# Altium PCB Sitara_Project_Rev_A_PCB.PcbDoc (part 9 of 9)
Units mm, origin at the board's own origin, x right, y up, seen from the top; angles counter-clockwise.
Board outline 120 x 85 mm, 8 copper layers (L1 (Sig), L2 (GND), L3 (PWR), L4 (Sig), L5 (GND), L6 (Sig), L7 (GND), L8 (Sig)), stack 1.188 mm thick; 458 components, 357 nets, 1916 pads, 1164 vias.
Unrouted connection lines stored in the file: 516.
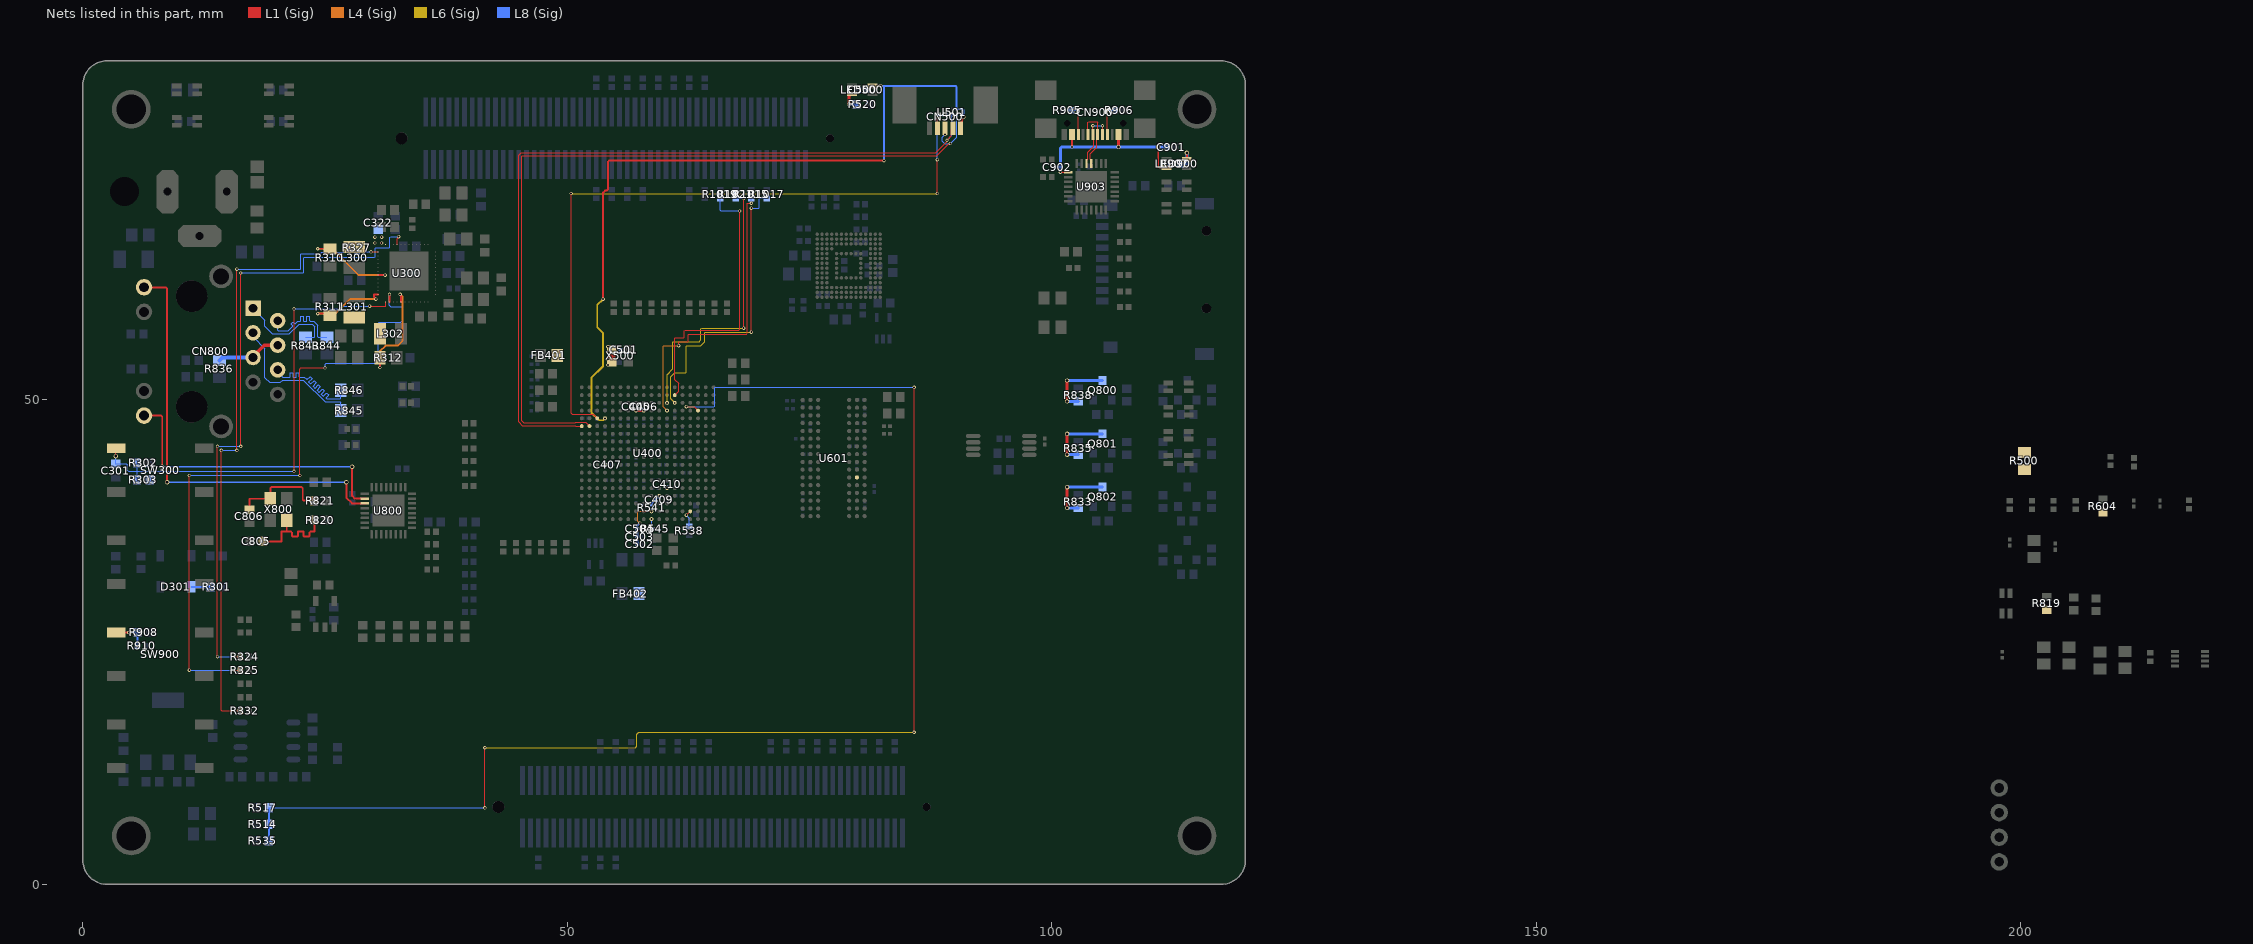
[diagram p12: the nets of this part, all layers, seen from the top]

## Via types
v1: diameter 0.35, hole 0.2, L1 (Sig) to L8 (Sig), tented both sides, 846 vias
v2: diameter 0.45, hole 0.3, L1 (Sig) to L8 (Sig), tented both sides, 302 vias
v3: diameter 0.45/0.45/0.45/0.45/0.45/0.45/0.45/0.45 (per signal layer), hole 0.3, L1 (Sig) to L8 (Sig), tented both sides, 16 vias

## Nets (pads, with @x,y where several pads share a name; then routed paths per layer and width w, separated by ;. In a path a pad name is that pad's centre, name@x,y a point inside that pad or via, vN(x,y) a via of type N, cw(c..) or ccw(c..) an arc to the next point about the centre after c; other vN are vias at no path point) (continued)
PMIC_nWAKEUP: R327.1 R332.1 U300.13 | length 65.3
  L1 (Sig) w0.1: v1(14.3,44.8) 14.3,17.959 14.359,17.9 R332.1@16.26,17.9 ; v1(15.9,44.8) v1(15.9,63.5) ; v1(29.75,65.275) U300.13@30.475,65.275
  L8 (Sig) w0.1: v1(14.3,44.8) v1(15.9,44.8) ; v1(15.9,63.5) 22.441,63.5 22.5,63.559 22.5,65.041 22.559,65.1 24.5,65.1 24.66,65.26 R327.1@28.3,65.26 28.315,65.275 v1(29.75,65.275)
PMIC_PB_IN: C301.2 R302.1 R303.1 SW300.1 U300.25 | length 49.2
  L1 (Sig) w0.1: v2(3.4,44.2) SW300.1@3.4,44.95 ; v1(21.8,42.625) v1(21.8,59.4) ; v1(29.6,59.675) 31.25,59.675 U300.25@31.25,60.1
  L1 (Sig) w0.2: SW300.1@3.4,44.95 SW300.1@3.45,45
  L8 (Sig) w0.1: v2(3.4,44.2) C301.2@3.4,43.375 3.425,43.4 4.483,43.4 4.6,43.283 4.6,42.742 4.717,42.625 5.6,42.625 ; R303.1@5.6,41.75 5.6,42.625 ; R302.1@5.6,43.5 5.6,42.625 ; v1(21.8,42.625) 5.6,42.625 ; v1(21.8,59.4) 26.5,59.4 26.775,59.675 v1(29.6,59.675)
PMIC_PRIMARY_PGOOD: R325.1 U300.26 | length 67.7
  L1 (Sig) w0.1: v1(11,22.1) v1(11,42.2) ; v1(15.6,22.1) R325.1@16.26,22.1 ; v1(22.4,42.2) 22.4,53.183 22.517,53.3 v1(25,53.3)
  L1 (Sig) w0.2: U300.26@31.65,60.1 v1(31.65,60.9)
  L8 (Sig) w0.1: v1(11,22.1) v1(15.6,22.1) ; v1(11,42.2) v1(22.4,42.2) ; v1(25,53.3) 25,53.683 25.117,53.8 30.383,53.8 30.5,53.917 30.5,57.883 30.617,58 32.8,58 33,58.2 33,59.483 32.883,59.6 31.8,59.6 31.65,59.75 v1(31.65,60.9)
PMIC_PWR_EN: R324.1 U300.9 | length 65
  L1 (Sig) w0.1: v1(13.9,23.5) v1(13.9,45.2) ; v1(15.6,23.5) R324.1@16.26,23.5 ; v1(16.3,45.2) v1(16.3,63.1) ; U300.9@32.448,66.05 32.448,66.637 32.592,66.78 v1(32.592,66.848)
  L8 (Sig) w0.1: v1(13.9,23.5) v1(15.6,23.5) ; v1(13.9,45.2) v1(16.3,45.2) ; v1(16.3,63.1) 22.741,63.1 22.8,63.159 22.8,64.641 22.859,64.7 30.1,64.7 30.2,64.8 30.2,65.641 30.259,65.7 31.641,65.7 31.7,65.759 31.7,66.789 31.759,66.848 v1(32.592,66.848)
PMIC_VDCDC1: L300.2 R310.1 U300.19 | length 10.1
  L1 (Sig) w0.2: v1(24.25,65.6) 25.465,65.6 R310.1@25.5,65.565 ; U300.19@30.475,62.875 v1(31.2,62.875)
  L4 (Sig) w0.2: v1(24.25,65.6) 25.75,65.6 28.475,62.875 v1(31.2,62.875)
PMIC_VDCDC2: L301.2 R311.1 U300.24 | length 8.9
  L1 (Sig) w0.2: v1(24.25,58.9) 25.325,58.9 R311.1@25.5,58.725 ; v1(30.25,60.4) 30.25,60.441 30.05,60.641 30.05,60.875 U300.24@30.475,60.875
  L4 (Sig) w0.2: v1(24.25,58.9) 26.05,58.9 27.55,60.4 v1(30.25,60.4)
PMIC_VDCDC3: L302.2 R312.1 U300.29 | length 11.2
  L1 (Sig) w0.2: v1(30.66,53.35) R312.1@30.66,54.35 ; v1(32.75,60.9) 32.75,60.859 32.85,60.759 U300.29@32.85,60.1
  L4 (Sig) w0.2: v1(30.66,53.35) 30.66,55.01 31.25,55.6 32.5,55.6 33,56.1 33,60.65 v1(32.75,60.9)
RJ45_LED_GR_A: CN800.9 U800.3 | length 44.7
  L1 (Sig) w0.2: CN800.9@6.32,61.63 6.35,61.6 8.583,61.6 8.7,61.483 v2(8.7,41.5) ; v2(27.2,41.5) 27.2,39.9 27.785,39.315 U800.3@29.115,39.315
  L8 (Sig) w0.2: v2(8.7,41.5) v2(27.2,41.5)
RJ45_LED_YEL_A: CN800.12 R819.1 U800.2 | length 31.1
  L1 (Sig) w0.2: CN800.12@6.32,48.38 8.083,48.38 8.2,48.263 v2(8.2,43.1) ; v2(27.8,43.1) 27.8,40.1 28.085,39.815 U800.2@29.115,39.815
  L8 (Sig) w0.2: v2(8.2,43.1) v2(27.8,43.1)
RJ45_RX_N: CN800.6 R846.2 | length 15
  L8 (Sig) w0.1: CN800.6@20.11,53.105 20.11,52.866 20.621,52.355 21.1,52.355 21.375,52.355 21.433,52.414 21.433,52.787 21.448,52.802 21.718,52.802 21.733,52.787 21.733,52.359 21.748,52.344 22.018,52.344 22.033,52.359 22.033,52.787 22.048,52.802 22.318,52.802 22.333,52.787 22.333,52.414 22.392,52.355 22.742,52.355 22.869,52.355 23.062,52.162 23.097,52.127 23.18,52.127 23.451,52.398 23.473,52.398 23.664,52.207 23.664,52.186 23.335,51.858 23.335,51.836 23.526,51.646 23.548,51.646 23.876,51.974 23.897,51.974 24.088,51.783 24.088,51.761 23.76,51.433 23.76,51.412 23.951,51.221 23.972,51.221 24.3,51.549 24.321,51.549 24.512,51.358 24.512,51.337 24.184,51.009 24.184,50.988 24.375,50.797 24.396,50.797 24.724,51.125 24.745,51.125 24.936,50.934 24.936,50.913 24.608,50.585 24.608,50.564 24.799,50.373 24.82,50.373 25.148,50.701 25.17,50.701 25.361,50.51 25.361,50.489 25.113,50.241 25.113,50.159 25.172,50.1 25.381,50.1 26.566,50.1 26.625,50.159 R846.2@26.625,51
RJ45_RX_P: CN800.3 R845.2 | length 15.1
  L8 (Sig) w0.1: CN800.3@17.57,56.915 17.57,56.53 18.8,55.3 18.8,52.3 19.3,51.8 20.4,51.8 20.655,52.055 22.745,52.055 25,49.8 26.566,49.8 26.625,49.741 R845.2@26.625,48.9
RJ45_TCT: CN800.4 CN800.5 R836.1 | length 6.7
  L1 (Sig) w0.4: CN800.5@17.57,54.375 17.57,54.487 18.728,55.645 CN800.4@20.11,55.645
  L8 (Sig) w0.4: R836.1@14.1,54.075 14.4,54.375 CN800.5@17.57,54.375
RJ45_TX_N: CN800.2 R844.2 | length 10.4
  L8 (Sig) w0.1: CN800.2@20.11,58.185 20.11,57.18 20.169,57.122 21.197,57.122 21.656,57.58 21.656,57.663 21.493,57.826 21.493,57.847 21.684,58.038 21.705,58.038 21.868,57.875 21.951,57.875 22.198,58.123 22.2,58.125 22.457,58.125 22.516,58.183 22.516,58.64 22.531,58.655 22.801,58.655 22.816,58.64 22.816,58.136 22.831,58.121 23.101,58.121 23.116,58.136 23.116,58.64 23.131,58.655 23.401,58.655 23.416,58.64 23.416,58.183 23.474,58.125 23.824,58.125 24.252,57.697 24.252,56.534 24.311,56.475 R844.2@25.2,56.475
RJ45_TX_P: CN800.1 R843.2 | length 10.4
  L8 (Sig) w0.1: CN800.1@17.57,59.455 18.8,58.225 18.8,57.6 19.578,56.822 21.322,56.822 22.324,57.825 23.7,57.825 23.952,57.572 23.952,56.534 23.894,56.475 R843.2@23,56.475
RTC_KALDO_nEN: R538.1 U400.B4 | length 1.8
  L1 (Sig) w0.1: v1(62.3,38.1) U400.B4@62.7,38.5
  L8 (Sig) w0.1: v1(62.3,38.1) 62.6,37.8 R538.1@62.6,36.94
STATUS_LED_B: Q802.3 R833.2 | length 6.9
  L1 (Sig) w0.3: v2(101.6,38.85) v2(101.6,41)
  L8 (Sig) w0.3: v2(101.6,38.85) R833.2@102.75,38.85 ; v2(101.6,41) Q802.3@105.25,41
STATUS_LED_G: Q801.3 R835.2 | length 7
  L1 (Sig) w0.3: v2(101.6,44.35) v2(101.6,46.5)
  L8 (Sig) w0.3: v2(101.6,44.35) R835.2@102.75,44.35 ; v2(101.6,46.5) Q801.3@105.25,46.5
STATUS_LED_R: Q800.3 R838.2 | length 6.9
  L1 (Sig) w0.3: v2(101.6,49.85) v2(101.6,52)
  L8 (Sig) w0.3: v2(101.6,49.85) R838.2@102.75,49.85 ; v2(101.6,52) Q800.3@105.25,52
SYS_BOOT2: R514.1 R517.2 R535.2 U400.R3 | length 140
  L1 (Sig) w0.1: v1(41.5,7.9) v1(41.5,14.1) ; v1(62.3,49.3) 63.1,49.3 U400.R3@63.5,48.9 ; v1(85.8,15.7) v1(85.8,51.3)
  L6 (Sig) w0.1: v1(41.5,14.1) 57.041,14.1 57.2,14.259 57.2,15.5 57.4,15.7 v1(85.8,15.7)
  L8 (Sig) w0.1: R517.2@19.2,7.9 v1(41.5,7.9) ; v1(62.3,49.3) 65.141,49.3 65.2,49.359 65.2,51.241 65.259,51.3 v1(85.8,51.3)
  L8 (Sig) w0.2: R535.2@19.2,4.5 R514.1@19.2,6.2 R517.2@19.2,7.9
SYS_nRESET: R908.1 R910.1 SW900.1 | length 3.6
  L1 (Sig) w0.2: SW900.1@3.45,26 v2(4.8,26)
  L8 (Sig) w0.2: v2(4.8,26) R908.1@5.65,26 5.65,24.61 R910.1@5.66,24.6
TIMER4: R1015.2 U400.R7 | length 31
  L1 (Sig) w0.1: v1(61.5,55.6) 61.5,55.941 61.559,56 62.441,56 62.5,56.059 62.5,56.741 62.559,56.8 68.541,56.8 68.6,56.859 68.6,70.3 v1(69,70.3)
  L4 (Sig) w0.1: v1(60.3,48.9) 59.9,49.3 59.9,55.541 59.959,55.6 v1(61.5,55.6)
  L8 (Sig) w0.1: v1(69,70.3) R1015.2@69,70.8
TIMER5: R1017.2 U400.T6 | length 30.5
  L1 (Sig) w0.1: v1(69,57) v1(69,69.8)
  L6 (Sig) w0.1: v1(61.1,49.7) 60.7,50.1 60.7,52.4 61.1,52.8 62.241,52.8 62.3,52.859 62.3,55.541 62.359,55.6 63.8,55.6 64.2,56 64.2,56.941 64.259,57 v1(69,57)
  L8 (Sig) w0.1: v1(69,69.8) 69.741,69.8 69.8,69.859 69.8,70.741 69.859,70.8 R1017.2@70.6,70.8
TIMER6: R1019.2 U400.U6 | length 29.1
  L1 (Sig) w0.1: U400.U6@61.1,50.5 61.5,50.9 61.5,51.7 61.1,52.1 61.1,56.341 61.159,56.4 62.041,56.4 62.1,56.459 62.1,57.141 62.159,57.2 67.7,57.2 67.8,57.3 v1(67.8,69.5)
  L8 (Sig) w0.1: R1019.2@65.8,70.8 65.8,69.559 65.859,69.5 v1(67.8,69.5)
TIMER7: R1021.2 U400.T7 | length 29.3
  L1 (Sig) w0.1: v1(68.2,57.4) v1(68.2,70.8)
  L6 (Sig) w0.1: v1(60.3,49.7) 60.3,52.6 60.9,53.2 60.9,55.941 60.959,56 63.6,56 63.8,56.2 63.8,57.341 63.859,57.4 v1(68.2,57.4)
  L8 (Sig) w0.1: R1021.2@67.4,70.8 v1(68.2,70.8)
USB0_D_N: CN500.2 U400.N18 U501.2 | length 83.4
  L1 (Sig) w0.1: U400.N18@51.5,47.3 50.9,47.3 50.85,47.35 45.376,47.35 45,47.726 45,75.266 45.234,75.5 88.025,75.5 89.152,76.627 89.152,76.752 v1(89.2,76.8) 89.659,77.259 89.659,77.909 CN500.2@89.8,78.05
  L8 (Sig) w0.1: v1(89.2,76.8) 89.7,77.3 U501.2@89.7,79.4
USB0_D_P: CN500.3 U400.N17 U501.1 | length 85
  L1 (Sig) w0.1: U400.N17@52.3,47.3 51.9,47.7 50.9,47.7 50.85,47.65 45.5,47.65 45.3,47.85 45.3,75.141 45.359,75.2 88.149,75.2 89.364,76.415 89.489,76.415 v1(89.537,76.463) ; v1(89,77.4) CN500.3@89,78.05
  L8 (Sig) w0.1: v1(89,77.4) 88.7,77.1 88.7,76.7 88.952,76.448 89.523,76.448 v1(89.537,76.463) 90.2,77.125 U501.1@90.2,79.4
USB0_ID: CN500.4 U400.P16 U501.3 | length 73.5
  L1 (Sig) w0.1: v1(50.4,71.3) 50.4,48.6 50.5,48.5 52.7,48.5 U400.P16@53.1,48.1 ; v1(88.2,71.3) v1(88.2,74.8) ; CN500.4@88.2,78.05 v1(88.2,79.1)
  L6 (Sig) w0.1: v1(50.4,71.3) v1(88.2,71.3)
  L8 (Sig) w0.1: v1(88.2,74.8) v1(88.2,79.1) 88.218,79.118 88.218,79.341 88.277,79.4 U501.3@89.2,79.4
USB0_VBUS: C500.1 CN500.1 LED500.4 R500.2 U400.P15 U501.6 | length 80.8
  L1 (Sig) w0.2: v1(53.7,60.4) 53.7,71.4 53.9,71.6 54.083,71.6 54.2,71.717 54.2,74.583 54.317,74.7 v1(82.7,74.7) ; LED500.4@81.5,82.4 v2(82.3,82.4)
  L1 (Sig) w0.3: CN500.1@90.6,78.05 90.7,78.15 90.7,78.959 90.9,79.159 v2(90.9,79.2)
  L6 (Sig) w0.2: v1(53.7,60.4) 53.1,59.8 53.1,57.5 53.7,56.9 53.7,53.5 52.5,52.3 52.5,48.7 53.3,47.9 53.7,47.9 v1(53.9,48.1)
  L8 (Sig) w0.2: C500.1@80.94,82 80.94,82.4 v2(82.3,82.4) 82.7,82.4 ; v1(82.7,74.7) 82.7,82.4 ; v2(90.9,79.2) 90.9,79.883 90.783,80 U501.6@90.2,80 90.2,82.283 90.083,82.4 82.7,82.4
USB0_VBUS_LED: LED500.2 R520.1 | length 2
  L1 (Sig) w0.3: v2(79.1,80.5) 79.1,81.4 79.3,81.6 LED500.2@79.4,81.6
  L8 (Sig) w0.3: v2(79.1,80.5) R520.1@79.85,80.5
USB9_CC1: CN900.A5 R906.2 | length 3.3
  L1 (Sig) w0.1: CN900.A5@105.75,77.4 v1(105.75,79.9)
  L8 (Sig) w0.1: v1(105.75,79.9) R906.2@106.56,79.9
USB9_CC2: CN900.B5 R905.2 | length 3.2
  L1 (Sig) w0.1: CN900.B5@102.75,77.4 v1(102.75,79.9)
  L8 (Sig) w0.1: R905.2@102.04,79.9 v1(102.75,79.9)
USB9_D_N: CN900.A7 CN900.B7 U903.5 | length 6.2
  L1 (Sig) w0.1: U903.5@103.6,74.4 103.6,74.725 103.7,74.825 103.7,75.549 104.35,76.199 104.35,77.3 CN900.A7@104.25,77.4 v1(104.25,78.3) ; CN900.B7@105.25,77.4 v1(105.25,78.3)
  L8 (Sig) w0.1: v1(104.25,78.3) v1(105.25,78.3)
USB9_D_P: CN900.A6 CN900.B6 U903.4 | length 6.9
  L1 (Sig) w0.1: CN900.B6@103.75,77.4 103.75,78.641 103.809,78.7 104.691,78.7 104.75,78.641 CN900.A6@104.75,77.4 104.65,77.3 104.65,76.075 104,75.425 104,74.825 104.1,74.725 U903.4@104.1,74.4
USB9_VBUS: C901.1 C902.2 CN900.A4 CN900.B4 LED900.4 U903.8 | length 19.8
  L1 (Sig) w0.2: v1(100.9,73.5) U903.8@101.7,73.5 ; v1(102.1,76.1) CN900.B4@102.1,77.4 ; v2(111,76.1) 111,74.117 111.117,74 LED900.4@111.85,74
  L1 (Sig) w0.3: v2(106.9,76.1) CN900.A4@106.9,77.4
  L8 (Sig) w0.3: v1(100.9,73.5) C902.2@100.9,74 100.9,75.983 101.017,76.1 v1(102.1,76.1) v2(106.9,76.1) v2(111,76.1) C901.1@111.92,76.1
USB9_VBUS_LED: LED900.2 R907.1 | length 2.4
  L1 (Sig) w0.2: LED900.2@113.95,74.8 v2(113.95,75.5)
  L8 (Sig) w0.3: R907.1@113.338,74.4 113.95,74.4 v2(113.95,75.5)
USB_5VS: C322.2 D301.1 R301.1 R303.2 R500.1 U300.12 | length 1.9
  L8 (Sig) w0.2: D301.1@11.22,30.7 R301.1@13.15,30.7
  other v1: 30.15,66.2 30.85,66.2 30.15,66.8 30.85,66.8
VDD_ADC: C409.2 FB402.2 R541.2 U400.D8 | length 1.3
  L8 (Sig) w0.2: R541.2@58.7,39.2 58.775,39.275 58.775,39.375 59.31,39.91 59.425,39.91 59.5,39.985 v1(59.5,40.1)
VDD_PLL: C405.2 C406.2 C407.2 C410.2 C501.2 FB401.2 U400.E7 U400.H15 U400.R10 U400.R11 X500.1 X500.4 | length 3.7
  L1 (Sig) w0.3: v1(57.1,48.9) v1(57.9,48.9)
  L1 (Sig) w0.8: X500.1@54.6,53.9 X500.4@54.6,55.2
  L8 (Sig) w0.2: v1(54.2,54.9) 55.5,54.9 C501.2@55.5,55.2
  other v1: 60.3,40.9 53.9,43.3 54.2,53.6 54.2,54.2 54.2,55.5
VREFN: R545.1 U400.A9 | length 1
  L8 (Sig) w0.1: v1(58.7,37.7) 58.7,36.775 R545.1@58.775,36.7
VREFP: C502.1 C503.1 C504.1 R541.1 U400.B9 | length 4.9
  L4 (Sig) w0.1: v1(57.5,37.3) 57.3,37.5 57.3,38.383 57.419,38.502 58.698,38.502 v1(58.7,38.5)
  L8 (Sig) w0.2: C504.1@57.2,36.7 57.2,37 v1(57.5,37.3)
  L8 (Sig) w0.3: C502.1@57.2,35.1 C503.1@57.2,35.9 C504.1@57.2,36.7
XTAL1: C805.2 R820.1 X800.1 | length 10.5
  L1 (Sig) w0.2: C805.2@18.575,35.4 20.5,35.4 20.5,36.4 21.05,36.4 ; X800.1@21.05,37.6 21.05,36.4 ; R820.1@23.85,37.6 23.9,37.6 23.9,36.4 23.611,36.4 23.511,36.4 23.394,36.283 23.394,35.939 23.364,35.909 22.824,35.909 22.794,35.939 22.794,36.379 22.764,36.409 22.224,36.409 22.194,36.379 22.194,35.939 22.164,35.909 21.624,35.909 21.594,35.939 21.594,36.283 21.477,36.4 21.336,36.4 21.05,36.4
XTAL2: C806.2 R821.1 X800.3 | length 10.2
  L1 (Sig) w0.2: C806.2@17.2,38.675 17.2,39.8 X800.3@19.35,39.8 19.35,40.883 19.467,41 22.583,41 22.7,40.883 22.7,39.717 22.817,39.6 R821.1@23.85,39.6
ZQ: R604.1 U601.L8
pads on no net: CN300.0 CN700.MH CN800. CN800.7 CN900.0 CN900.A8 CN900.B8 CN1000. CN1000.1 CN1000.2 CN1000.5 CN1000.9 CN1000.10 CN1000.13 CN1000.14 CN1000.17 CN1000.30 CN1000.34 CN1000.38 CN1000.42 CN1000.46 CN1000.50 CN1000.53 CN1000.54 CN1000.57 CN1000.58 CN1000.61 CN1000.62 CN1000.66 CN1000.70 CN1000.74 CN1000.78 CN1000.82 CN1000.86 CN1000.90 CN1000.94 CN1000.98 CN1001. CN1001.9 CN1001.10 CN1001.11 CN1001.12 CN1001.21 CN1001.22 CN1001.23 CN1001.24 CN1001.31 CN1001.32 CN1001.33 CN1001.34 CN1001.41 CN1001.42 CN1001.43 CN1001.44 CN1001.62 CN1001.66 CN1001.77 CN1001.81 CN1001.85 CN1001.89 CN1001.93 CN1001.94 CN1001.97 CN1001.98 LED300.1 LED300.3 LED301.1 LED301.3 LED302.1 LED302.3 LED303.1 LED303.3 LED500.1 LED500.3 LED501.1 LED501.2 LED502.1 LED502.2 LED503.1 LED503.2 LED504.1 LED504.2 LED900.1 LED900.3 LED901.1 LED901.2 LED902.1 LED902.2 R742.2 SW300.2 SW300.4 SW301.2 SW301.4 SW500.2 SW500.4 SW900.2 SW900.4 U300.11 U300.14 U300.15 U300.16 U300.17 U300.33 U300.34 U300.35 U300.36 U300.37 U300.38 U400.A2 U400.A3 U400.A4 U400.A11 U400.A12 U400.A14 U400.A15 U400.B6 U400.B10 U400.B11 U400.B12 U400.B14 U400.C11 U400.C13 U400.C14 U400.C18 U400.E17 U400.F15 U400.F16 U400.M5 U400.M15 U400.P18 U400.R6 U400.R17 U400.R18 U400.T14 U400.T18 U400.U11 U400.U14 U400.U16 U400.U18 U400.V6 U400.V12 U400.V14 U400.V17 U501.5 U601.J1 U601.J9 U601.L1 U601.L9 U701.1 U701.2 U701.3 U702.1 U703.A1 U703.A2 U703.A7 U703.A8 U703.A9 U703.A10 U703.A11 U703.A12 U703.A13 U703.A14 U703.B1 U703.B7 U703.B8 U703.B9 U703.B10 U703.B11 U703.B12 U703.B13 U703.B14 U703.C1 U703.C3 U703.C5 U703.C7 U703.C8 U703.C9 U703.C10 U703.C11 U703.C12 U703.C13 U703.C14 U703.D1 U703.D2 U703.D3 U703.D12 U703.D13 U703.D14 U703.E1 U703.E2 U703.E3 U703.E5 U703.E8 U703.E9 U703.E10 U703.E12 U703.E13 U703.E14 U703.F1 U703.F2 U703.F3 U703.F10 U703.F12 U703.F13 U703.F14 U703.G1 U703.G2 U703.G3 U703.G10 U703.G12 U703.G13 U703.G14 U703.H1 U703.H2 U703.H3 U703.H12 U703.H13 U703.H14 U703.J1 U703.J2 U703.J3 U703.J12 U703.J13 U703.J14 U703.K1 U703.K2 U703.K3 U703.K6 U703.K7 U703.K10 U703.K12 U703.K13 U703.K14 U703.L1 U703.L2 U703.L3 U703.L12 U703.L13 U703.L14 U703.M1 U703.M2 U703.M3 U703.M7 U703.M8 U703.M9 U703.M10 U703.M11 U703.M12 U703.M13 U703.M14 U703.N3 U703.N6 U703.N7 U703.N8 U703.N9 U703.N10 U703.N11 U703.N12 U703.N13 U703.N14 U703.P2 U703.P7 U703.P8 U703.P9 U703.P10 U703.P11 U703.P12 U703.P13 U703.P14 U902.1 U903.1 U903.2 U903.10 U903.11 U903.12 U903.13 U903.14 U903.15 U903.16 U903.17 U903.18 U903.19 U903.20 U903.21 U903.22 U903.23 U903.24 U903.27 U903.28

## Polygon pours and split planes (outlines as drawn)
DGND on L1 (Sig) "DGND_L01_P062" (solid, pour order 62): 58.8,33.5 58.8,32.5 60.6,32.5 60.6,33.5
DGND on L1 (Sig) "DGND_L01_P059" (solid, pour order 59): 46.3,53.3 46.3,54.7 45.7,54.7 45.7,48.7 47.6,48.7 47.6,53.3
DGND on L1 (Sig) "DGND_L01_P057" (solid, pour order 57): 20,38.3 20,36.4 17.7,36.4 17.7,35.1 16.3,35.1 16.3,37.8 18.1,37.8 18.1,38.3
DGND on L1 (Sig) "DGND_L01_P056" (solid, pour order 56): 20.4,40.5 22.1,40.5 22.1,39.1 20.4,39.1
DP3.3VS_B on L1 (Sig) "DP3.3VS_B_L01_P048" (solid, pour order 48): 103.2,75.5 103.2,73.9 101.9,73.9 101.9,75.5
CGND on L1 (Sig) "CGND_L01_P044" (solid, remove dead copper, pour order 44): 108.5,81 110.7,81 110.7,84.5 108.5,84.5
CGND on L1 (Sig) "CGND_L01_P043" (solid, remove dead copper, pour order 43): 98.3,81 100.5,81 100.5,84.5 98.3,84.5
CGND on L1 (Sig) "CGND_L01_P041" (solid, remove dead copper, pour order 41): 92,78.6 94.4,78.6 94.4,84.5 92,84.5
CGND on L1 (Sig) "CGND_L01_P040" (solid, remove dead copper, pour order 40): 83.6,78.6 86,78.6 86,84.5 83.6,84.5
DP5VS on L1 (Sig) "DP5VS_L01_P034" (solid, pour order 34): 37.1,61.425 37.25,61.275 37.25,59.525 38.25,59.525 38.25,60.7 37.175,61.775 36,61.775 36,61.575 36.95,61.575
PMIC_LDO3_VOUT on L1 (Sig) "PMIC_LDO3_VOUT_L01_P032" (solid, pour order 32): 40.25,61.1 39.825,61.525 38.625,61.525 37.975,62.175 36,62.175 36,61.975 37.275,61.975 37.4,61.85 38.65,60.6 38.65,59.6 40.25,59.6
PMIC_LDO4_VOUT on L1 (Sig) "PMIC_LDO4_VOUT_L01_P031" (solid, pour order 31): 36,63.375 37.8,63.375 40.25,63.375 40.25,61.925 38.7,61.925 37.45,63.175 36,63.175
DP5VS on L1 (Sig) "DP5VS_L01_P030" (solid, pour order 30): 33.95,60.525 33.95,59.4 34,59.35 34,58.075 35.225,58.075 35.225,59.15 34.575,59.15 34.15,59.575 34.15,60.525
DP1.1V_CORE on L1 (Sig) "DP1.1V_CORE_L01_P028" (solid, pour order 28): 31.8,55.05 31.8,53.65 33,53.65 33,55.05
PMIC_VDCDC3 on L1 (Sig) "PMIC_VDCDC3_L01_P027" (solid, pour order 27): 30.05,58 30.05,53.6 31.35,53.6 31.35,58
PMIC_L3 on L1 (Sig) "PMIC_L3_L01_P026" (solid, pour order 26): 33.75,60.525 33.75,55.6 32.15,55.6 32.15,58 33.55,59.4 33.55,60.525
DP1.1V_MPU on L1 (Sig) "DP1.1V_MPU_L01_P024" (solid, pour order 24): 26.25,59.9 26.25,61.1 24.85,61.1 24.85,59.9
PMIC_VDCDC2 on L1 (Sig) "PMIC_VDCDC2_L01_P023" (solid, pour order 23): 29.25,57.85 24.75,57.85 24.75,59.35 29.25,59.35
PMIC_L2 on L1 (Sig) "PMIC_L2_L01_P022" (solid, pour order 22): 30.925,61.375 26.875,61.375 26.875,60.05 29.1,60.05 29.5,60.45 29.5,60.85 29.825,61.175 30.925,61.175
DP5VS on L1 (Sig) "DP5VS_L01_P020" (solid, pour order 20): 30.925,62.175 30.925,61.575 30.05,61.575 30.025,61.6 28.3,61.6 28.3,62.175
PMIC_LDO2_VOUT on L1 (Sig) "PMIC_LDO2_VOUT_L01_P019" (solid, pour order 19): 35.55,65.6 35.85,65.6 36.25,66 38.45,66 38.45,67.3 36.75,67.3 35.95,66.5 35.55,66.5
DP5VS on L1 (Sig) "DP5VS_L01_P017" (solid, pour order 17): 36.65,67.6 38.05,67.6 38.05,68.1 36.35,68.1 35.15,66.9 35.15,65.6 35.35,65.6 35.35,66.6 35.45,66.7 35.75,66.7
PMIC_LDO1_VOUT on L1 (Sig) "PMIC_LDO1_VOUT_L01_P016" (solid, pour order 16): 34.75,68.1 34.85,68.1 36.65,69.9 36.65,72.1 38.05,72.1 38.05,68.3 36.25,68.3 34.95,67 34.95,65.6 34.75,65.6
DP1.5V_DDR on L1 (Sig) "DP1.5V_DDR_L01_P014" (solid, pour order 14): 24.85,64.4 26.25,64.4 26.25,63.1 24.85,63.1
PMIC_VDCDC1 on L1 (Sig) "PMIC_VDCDC1_L01_P013" (solid, pour order 13): 24.75,64.9 29.15,64.9 29.15,66.5 24.75,66.5
PMIC_L1 on L1 (Sig) "PMIC_L1_L01_P012" (solid, pour order 12): 29.125,63.4 29.125,64.25 26.825,64.25 26.825,62.375 30.95,62.375 30.95,62.575 29.95,62.575
DP5VS on L1 (Sig) "DP5VS_L01_P011" (solid, pour order 11): 32.75,66.475 32.75,65.6 33.35,65.6 33.35,66.5 32.75,66.5 32.75,65.6
IN5VS on L1 (Sig) "IN5VS_L01_P009" (solid, pour order 9): 32.55,67.3 33.35,67.3 33.35,68.5 32.65,68.5 32.65,70.1 31.65,70.1 31.65,66.8 31.95,66.5 31.95,65.6 32.15,65.6 32.15,66.9 32.35,67.1
USB_5VS on L1 (Sig) "USB_5VS_L01_P1" (solid, pour order 7): 31.35,66.7 31.05,67 29.95,67 29.95,66 30.65,66 31.05,65.6 31.35,65.6
GNDPWR on L1 (Sig) "GNDPWR_L01_P002" (solid, pour order 2): 14.2,65.5 14.5,65.8 14.5,68.1 14.2,68.4 11.7,68.4 11.2,68.9 11.2,73.8 10.9,74.1 7.2,74.1 6.9,73.8 6.9,65.8 7.2,65.5
EXT_5V on L1 (Sig) "EXT_5V_L1(Sig)" (solid, pour order 1): 15,69 15.25,68.75 15.25,67.25 15.5,67 18.75,67 18.75,68.35 18.7,68.4 16.7,68.4 16.6,68.5 16.6,73.8 16.3,74.1 13.6,74.1 13.3,73.8 13.3,69.7 14,69
DP3.3VS_AMS on L8 (Sig) "DP3.3VS_AMS_L08_P066" (solid, pour order 66): 44.6,78 44.6,76 47,76 47,78
IN5VS on L8 (Sig) "IN5VS_L08_P065" (solid, pour order 65): 35,78 35,76 38.25,76 38.25,78
DP3.3VS_MIC on L8 (Sig) "DP3.3VS_MIC_L08_P064" (solid, pour order 64): 48.6,78 48.6,76 51,76 51,78
GNDOSC1 on L8 (Sig) "GNDOSC1_L08_P063" (solid, pour order 63): 60.3,35 58.8,35 58.8,34.5 60.3,34.5 60.3,32.5 61.5,32.5 61.5,37.3 61.6,37.4 62,37.4 62.1,37.5 62.1,37.8 62,37.9 61,37.9 60.7,37.6 60.7,35.4
DGND on L8 (Sig) "DGND_L08_P061" (solid, pour order 61): 53.4,35.7 53.4,33.8 54.8,33.8 54.8,32.7 56.3,32.7 56.3,34.4 56.3,35.7
DGND on L8 (Sig) "DGND_L08_P060" (solid, pour order 60): 31,40.2 31,36.9 33.2,36.9 33.2,40.2
DGND on L8 (Sig) "DGND_L08_P058" (solid, pour order 58): 40.3,69.7 40.3,67.4 39.5,67.4 39.5,62.5 38.4,62.5 38.4,69.7
DP3.3VS_B on L8 (Sig) "DP3.3VS_B_L08_P053" (solid, pour order 53): 12.5,4 16.5,4 16.5,8.1 12.5,8.1
DGND on L8 (Sig) "DGND_L08_P052" (solid, pour order 52): 15.4,17.1 15.4,12.5 17.9,12.5 17.9,17.1
DGND on L8 (Sig) "DGND_L08_P051" (solid, pour order 51): 10.4,11.7 12.6,11.7 12.6,14.2 10.4,14.2
DP3.3VS_B on L8 (Sig) "DP3.3VS_B_L08_P050" (solid, pour order 50): 103.2,75.5 103.2,73.9 101.9,73.9 101.9,75.5
CGND on L8 (Sig) "CGND_L08_P047" (solid, remove dead copper, pour order 47): 114.8,55.4 114.8,54.1 119.5,54.1 119.5,55.4
CGND on L8 (Sig) "CGND_L08_P046" (solid, remove dead copper, pour order 46): 114.8,70.9 114.8,69.6 119.5,69.6 119.5,70.9
DGND on L8 (Sig) "DGND_L08_P045" (solid, remove dead copper, pour order 45): 103.7,66.1 103.7,65.3 105.9,65.3 105.9,66.1
DGND on L8 (Sig) "DGND_L08_P037" (solid, pour order 37): 39.75,78 39.75,76 43,76 43,78
DP5VS on L8 (Sig) "DP5VS_L08_P033" (solid, pour order 33): 36.95,62.4 38.05,62.4 38.05,63.6 36.95,63.6
DP1.1V_CORE on L8 (Sig) "DP1.1V_CORE_L08_P029" (solid, pour order 29): 31.8,55.05 31.8,53.65 33,53.65 33,55.05
DP1.1V_MPU on L8 (Sig) "DP1.1V_MPU_L08_P025" (solid, pour order 25): 24.85,61.2 26.25,61.2 26.25,59.9 24.85,59.9
DP5VS on L8 (Sig) "DP5VS_L08_P021" (solid, pour order 21): 28.25,62.9 28.25,61.6 29.55,61.6 29.55,62.9
DP5VS on L8 (Sig) "DP5VS_L08_P018" (solid, pour order 18): 38.05,69.6 38.05,67.6 36.75,67.6 36.75,69.6
DP1.5V_DDR on L8 (Sig) "DP1.5V_DDR_L08_P015" (solid, pour order 15): 24.85,64.4 26.25,64.4 26.25,63.1 24.85,63.1
IN5VS on L8 (Sig) "IN5VS_L08_P010" (solid, pour order 10): 31.75,67.4 33.35,67.4 33.35,68.5 31.75,68.5
USB_5VS on L8 (Sig) "USB_5VS_L08_P008" (solid, pour order 8): 29.95,68.1 29.95,66 31.35,66 31.35,66.7 31.05,67 31.05,68.1
GNDPWR on L8 (Sig) "GNDPWR_L8(Sig)" (solid, pour order 5): 14.25,65.5 15.25,64.5 17,64.5 17,66 15.45,66 14.5,66.95 14.5,68.1 14.2,68.4 11.7,68.4 11.2,68.9 11.2,73.8 10.9,74.1 7.2,74.1 6.9,73.8 6.9,67.75 6.25,67.75 6.25,65.5 6,65.5 6,63.5 7.5,63.5 7.5,65.5
CGND on L8 (Sig) "CGND_L1(Sig)" (solid, pour order 4): 4.5,66.25 5.75,66.25 5.75,67.75 3,67.75 3,65.6 2.9,65.6 1.3,65.6 1.3,63.4 4.5,63.4
CGND on L4 (Sig) "CGND_L04_P036" (solid, pour order 36): 6.5,8 8,6.5 8,0.5 2,0.5 0.5,2 0.5,83 2,84.5 118,84.5 119.5,83 119.5,2 118,0.5 112,0.5 112,6.5 113.5,8 118,8 118,77 113.5,77 112,78.5 112,83 8,83 8,78.5 6.5,77 2,77 2,8
CGND on L4 (Sig) "CGND_L4(Sig)" (solid, pour order 3): 1.3,63.4 4.5,63.4 4.5,65.6 1.3,65.6
DP1.8VS_eMMC on L3 (PWR) "DP1.8VS_EMMC_L03_P039" (solid, remove dead copper, pour order 39): 81.5,65.4 76.8,65.4 76.8,61.6 79.8,61.6 79.8,59.3 83.6,59.3 83.6,58 72.5,58 72.5,71.3 81.5,71.3
DP3.3VS_B on L3 (PWR) "DP3.3VS_B_L03_P038" (solid, remove dead copper, pour order 38): 77.8,65.1 77.8,62.6 80.3,62.6 80.3,65.1

## Keep-outs
Keep-Out Layer:
  the board outline again, w0.1

## Silkscreen, mask and mechanical layers (free items; w line width, h text height)
Top Overlay:
  text "DC 5V" at 12.6,81.025 h1.52
  text "LDO_MIC" at 22.05,81.025 h1.52
  text "USB-B" at 73.6,81.025 h1.52
  text "PMIC" at 12.6,77.775 h1.52
  text "LDO_AMS" at 22.05,77.775 h1.52
  text "USB-C" at 114.8,73.425 h1.52
  text "TXD" at 114.8,71.125 h1.52
  text "RXD" at 114.8,68.825 h1.52
  text "LED1" at 114.85,50.375 h1.52
  text "LED2" at 114.85,47.875 h1.52
  text "LED3" at 114.85,45.375 h1.52
  text "LED4" at 114.85,42.875 h1.52
  text "PWR ON" at 4.625,37.775 h1.52
  text "PWR RST" at 4.625,28.275 h1.52
  text "SOC RST" at 4.625,18.775 h1.52
  text "uSD BOOT" at 4,9.275 h1.52

## Text inside footprints (layer, text, board x,y; h text height)
LED300: Mechanical 13 "R" at 8.807,82.241 h0.5; Mechanical 13 "+" at 8.839,81.443 h0.5; Mechanical 13 "B" at 12.516,81.441 h0.5; Mechanical 13 "G" at 12.501,82.241 h0.5
LED301: Mechanical 13 "R" at 18.307,82.241 h0.5; Mechanical 13 "+" at 18.339,81.443 h0.5; Mechanical 13 "B" at 22.016,81.441 h0.5; Mechanical 13 "G" at 22.001,82.241 h0.5
LED302: Mechanical 13 "R" at 18.307,78.991 h0.5; Mechanical 13 "+" at 18.339,78.193 h0.5; Mechanical 13 "B" at 22.016,78.191 h0.5; Mechanical 13 "G" at 22.001,78.991 h0.5
LED303: Mechanical 13 "R" at 8.807,78.991 h0.5; Mechanical 13 "+" at 8.839,78.193 h0.5; Mechanical 13 "B" at 12.516,78.191 h0.5; Mechanical 13 "G" at 12.501,78.991 h0.5
LED500: Mechanical 13 "G" at 78.699,81.759 h0.5 r180; Mechanical 13 "B" at 78.684,82.559 h0.5 r180; Mechanical 13 "+" at 82.361,82.557 h0.5 r180; Mechanical 13 "R" at 82.393,81.759 h0.5 r180
LED501: Mechanical 13 "R" at 111.157,51.591 h0.5; Mechanical 13 "+" at 111.189,50.793 h0.5; Mechanical 13 "G" at 114.851,51.591 h0.5; Mechanical 13 "B" at 114.866,50.791 h0.5
LED502: Mechanical 13 "R" at 111.157,49.091 h0.5; Mechanical 13 "+" at 111.189,48.293 h0.5; Mechanical 13 "G" at 114.851,49.091 h0.5; Mechanical 13 "B" at 114.866,48.291 h0.5
LED503: Mechanical 13 "R" at 111.157,46.591 h0.5; Mechanical 13 "+" at 111.189,45.793 h0.5; Mechanical 13 "G" at 114.851,46.591 h0.5; Mechanical 13 "B" at 114.866,45.791 h0.5
LED504: Mechanical 13 "R" at 111.157,44.091 h0.5; Mechanical 13 "+" at 111.189,43.293 h0.5; Mechanical 13 "G" at 114.851,44.091 h0.5; Mechanical 13 "B" at 114.866,43.291 h0.5
LED800: Mechanical 13 "R" at 198.741,30.943 h0.5 r270; Mechanical 13 "+" at 197.943,30.911 h0.5 r270; Mechanical 13 "G" at 198.741,27.249 h0.5 r270; Mechanical 13 "B" at 197.941,27.234 h0.5 r270
LED900: Mechanical 13 "G" at 114.651,74.641 h0.5; Mechanical 13 "B" at 114.666,73.841 h0.5; Mechanical 13 "+" at 110.989,73.843 h0.5; Mechanical 13 "R" at 110.957,74.641 h0.5
LED901: Mechanical 13 "B" at 114.666,71.541 h0.5; Mechanical 13 "G" at 114.651,72.341 h0.5; Mechanical 13 "+" at 110.989,71.543 h0.5; Mechanical 13 "R" at 110.957,72.341 h0.5
LED902: Mechanical 13 "B" at 114.666,69.241 h0.5; Mechanical 13 "G" at 114.651,70.041 h0.5; Mechanical 13 "+" at 110.989,69.243 h0.5; Mechanical 13 "R" at 110.957,70.041 h0.5